# EAGLE board Copernicus-DIP-Breakout-Panel-v14 (EAGLE 6.4)
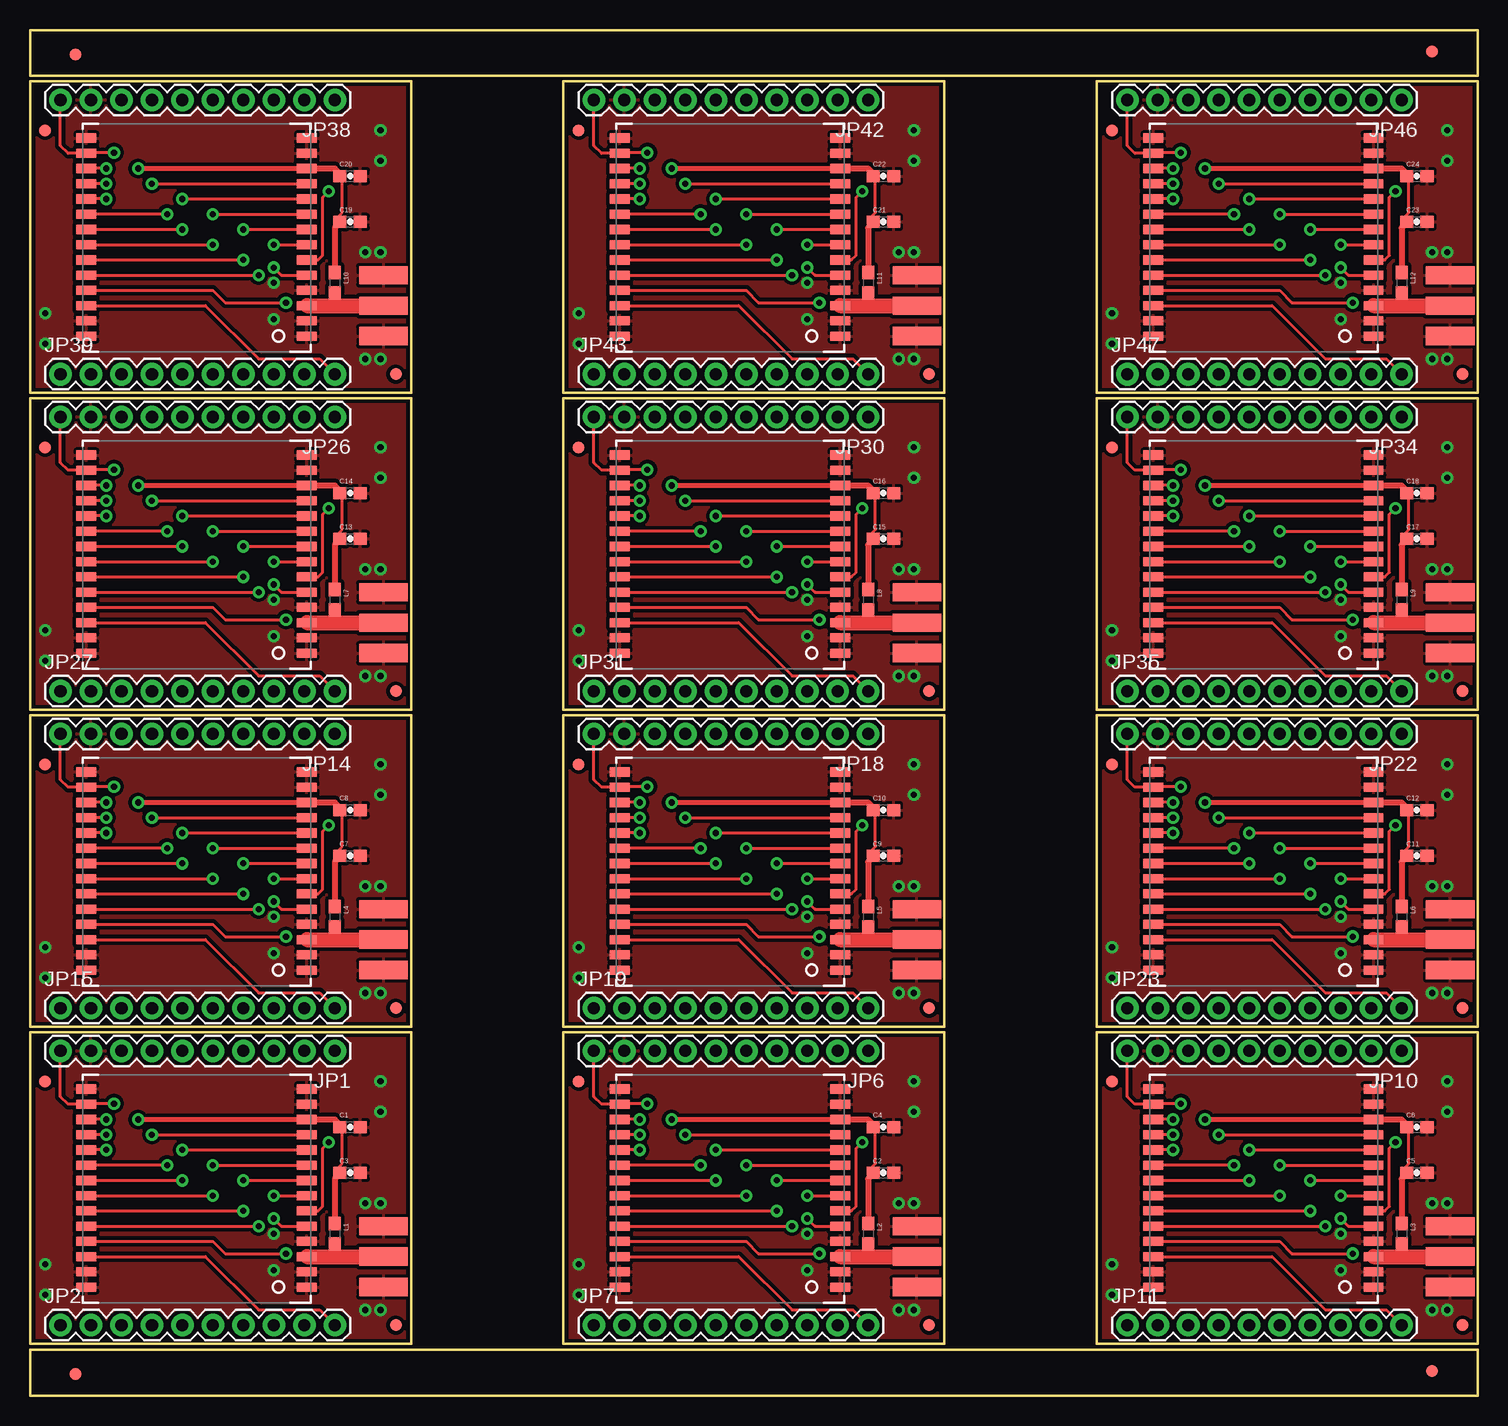
[diagram p0: board, top side]
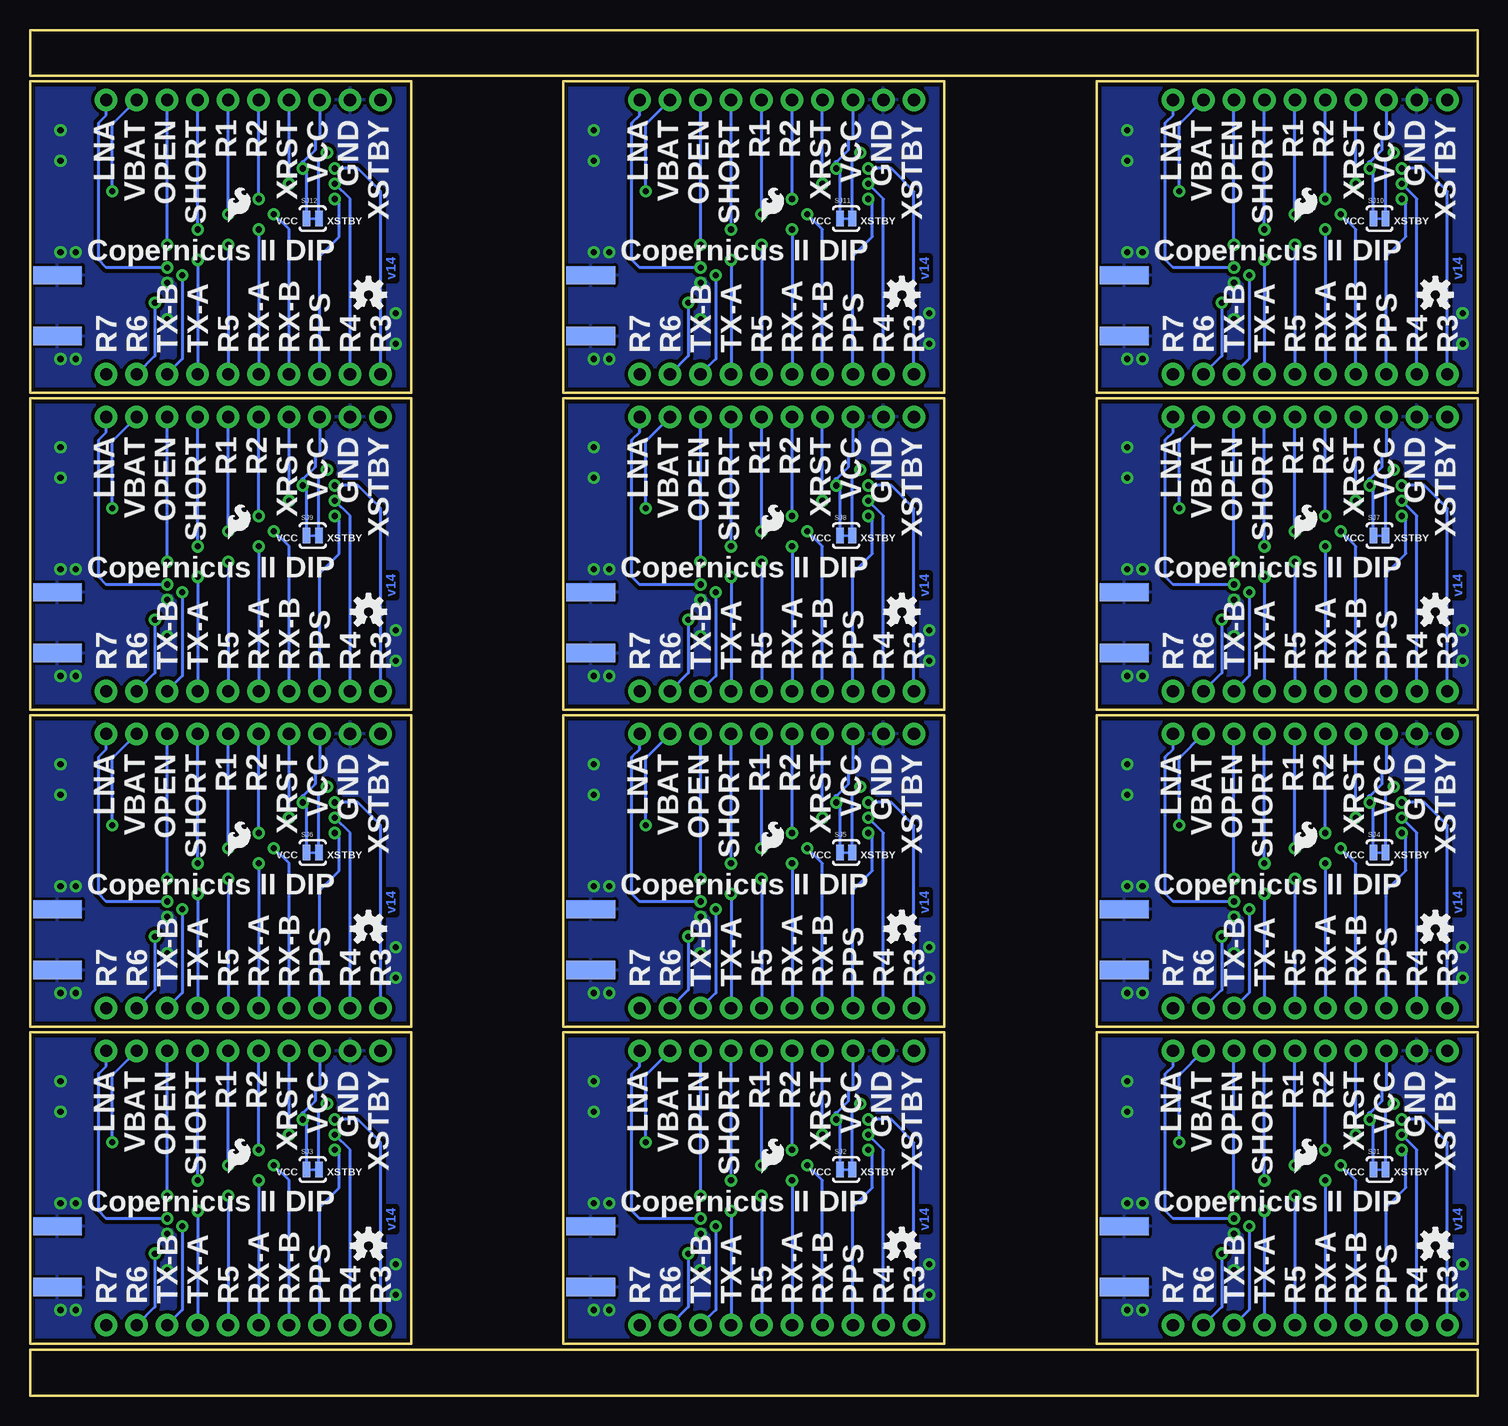
[diagram p1: board, bottom side, seen from below]

Size 120.65 x 113.79 mm. Coordinates in mm from the lower left corner, seen from the top.
Outline: 0,4.32 31.75,4.32 31.75,30.26 0,30.26 0,4.32
Outline: 44.45,4.32 76.2,4.32 76.2,30.26 44.45,30.26 44.45,4.32
Outline: 88.9,4.32 120.65,4.32 120.65,30.26 88.9,30.26 88.9,4.32
Outline: 0,30.73 31.75,30.73 31.75,56.67 0,56.67 0,30.73
Outline: 44.45,30.73 76.2,30.73 76.2,56.67 44.45,56.67 44.45,30.73
Outline: 88.9,30.73 120.65,30.73 120.65,56.67 88.9,56.67 88.9,30.73
Outline: 0,57.15 31.75,57.15 31.75,83.09 0,83.09 0,57.15
Outline: 44.45,57.15 76.2,57.15 76.2,83.09 44.45,83.09 44.45,57.15
Outline: 88.9,57.15 120.65,57.15 120.65,83.09 88.9,83.09 88.9,57.15
Outline: 0,83.57 31.75,83.57 31.75,109.51 0,109.51 0,83.57
Outline: 44.45,83.57 76.2,83.57 76.2,109.51 44.45,109.51 44.45,83.57
Outline: 88.9,83.57 120.65,83.57 120.65,109.51 88.9,109.51 88.9,83.57
Outline: 0,109.98 120.65,109.98 120.65,113.79 0,113.79 0,109.98
Outline: 120.65,3.81 0,3.81 0,0 87.38,0 88.9,0 120.65,0 120.65,3.81
Copper layers (1*16): Top 0.035mm / dielectric 1.5mm / Bottom 0.035mm
Design rules "SparkFun": minimum track width 8mil, minimum drill 20mil, track to track 8mil, track to pad 8mil, pad to pad 8mil, via to via 8mil, smd to smd 8mil, copper to edge 8mil, drill to drill 8mil, minimum pad ring 12mil, minimum via ring 10mil, stop-mask expansion 4mil, vias tented up to drill 20mil, thermal gap 10mil
Net classes: 0 default: width 0.254 mm; 1 power: width 0.305 mm

## Footprints (pad centres in the part's own frame; a part is rotated, then mirrored left to right if it is on the bottom)
0603-CAP = smd 1.1 x 1: 1 -0.85,0; 2 0.85,0
FIDUCIAL-1X2 = smd 1 x 1: 1 0,0
1X10 = drill 1.016 pad 1.88: 1 0,0; 2 2.54,0; 3 5.08,0; 4 7.62,0; 5 10.16,0; 6 12.7,0; 7 15.24,0; 8 17.78,0; 9 20.32,0; 10 22.86,0
SMA_EDGE = smd 1.524 x 4.064: GND@0 0,0; GND@1 5.08,0; SIG 2.54,0 | smd 1.524 x 4.064 bottom: GND@2 0,0; GND@3 5.08,0
0603 = smd 1.1 x 1: 1 -0.85,0; 2 0.85,0
SJ_2S-TRACE = smd 0.635 x 1.27: 1 -0.508,0; 2 0.508,0
COPERNICUS = smd 0.762 x 1.651: 1 0,-18.364; 2 1.27,-18.364; 3 2.54,-18.364; 4 3.81,-18.364; 5 5.08,-18.364; 6 6.35,-18.364; 7 7.62,-18.364; 8 8.89,-18.364; 9 10.16,-18.364; 10 11.43,-18.364; 11 12.7,-18.364; 12 13.97,-18.364; 13 15.24,-18.364; 14 16.51,-18.364; 15 16.51,0; 16 15.24,0; 17 13.97,0; 18 12.7,0; 19 11.43,0; 20 10.16,0; 21 8.89,0; 22 7.62,0; 23 6.35,0; 24 5.08,0; 25 3.81,0; 26 2.54,0; 27 1.27,0; 28 0,0

## Placement (x,y rotation side)
C1  0.1uF  [0603-CAP]  26.67,22.37 0 top
C2  22pF  [0603-CAP]  71.12,18.56 0 top
C3  22pF  [0603-CAP]  26.67,18.56 0 top
C4  0.1uF  [0603-CAP]  71.12,22.37 0 top
C5  22pF  [0603-CAP]  115.57,18.56 0 top
C6  0.1uF  [0603-CAP]  115.57,22.37 0 top
C7  22pF  [0603-CAP]  26.67,44.97 0 top
C8  0.1uF  [0603-CAP]  26.67,48.78 0 top
C9  22pF  [0603-CAP]  71.12,44.97 0 top
C10  0.1uF  [0603-CAP]  71.12,48.78 0 top
C11  22pF  [0603-CAP]  115.57,44.97 0 top
C12  0.1uF  [0603-CAP]  115.57,48.78 0 top
C13  22pF  [0603-CAP]  26.67,71.39 0 top
C14  0.1uF  [0603-CAP]  26.67,75.2 0 top
C15  22pF  [0603-CAP]  71.12,71.39 0 top
C16  0.1uF  [0603-CAP]  71.12,75.2 0 top
C17  22pF  [0603-CAP]  115.57,71.39 0 top
C18  0.1uF  [0603-CAP]  115.57,75.2 0 top
C19  22pF  [0603-CAP]  26.67,97.81 0 top
C20  0.1uF  [0603-CAP]  26.67,101.62 0 top
C21  22pF  [0603-CAP]  71.12,97.81 0 top
C22  0.1uF  [0603-CAP]  71.12,101.62 0 top
C23  22pF  [0603-CAP]  115.57,97.81 0 top
C24  0.1uF  [0603-CAP]  115.57,101.62 0 top
E$1  [FIDUCIAL-1X2]  3.81,111.76 270 top
E$2  [FIDUCIAL-1X2]  116.84,112.01 90 top
E$3  [FIDUCIAL-1X2]  116.84,2.03 90 top
E$4  [FIDUCIAL-1X2]  3.81,1.78 270 top
JP1  [1X10]  25.4,28.72 180 top
JP2  [1X10]  2.54,5.86 0 top
JP3  SMA_EDGE  [SMA_EDGE]  29.46,14.11 270 top
JP4  LOGO-SFESK  [SFE-LOGO-FLAME]  15.24,18.56 0 bottom
JP5  SMA_EDGE  [SMA_EDGE]  73.91,14.11 270 top
JP6  [1X10]  69.85,28.72 180 top
JP7  [1X10]  46.99,5.86 0 top
JP8  LOGO-SFESK  [SFE-LOGO-FLAME]  59.69,18.56 0 bottom
JP9  SMA_EDGE  [SMA_EDGE]  118.36,14.11 270 top
JP10  [1X10]  114.3,28.72 180 top
JP11  [1X10]  91.44,5.86 0 top
JP12  LOGO-SFESK  [SFE-LOGO-FLAME]  104.14,18.56 0 bottom
JP13  SMA_EDGE  [SMA_EDGE]  29.46,40.53 270 top
JP14  [1X10]  25.4,55.13 180 top
JP15  [1X10]  2.54,32.27 0 top
JP16  LOGO-SFESK  [SFE-LOGO-FLAME]  15.24,44.97 0 bottom
JP17  SMA_EDGE  [SMA_EDGE]  73.91,40.53 270 top
JP18  [1X10]  69.85,55.13 180 top
JP19  [1X10]  46.99,32.27 0 top
JP20  LOGO-SFESK  [SFE-LOGO-FLAME]  59.69,44.97 0 bottom
JP21  SMA_EDGE  [SMA_EDGE]  118.36,40.53 270 top
JP22  [1X10]  114.3,55.13 180 top
JP23  [1X10]  91.44,32.27 0 top
JP24  LOGO-SFESK  [SFE-LOGO-FLAME]  104.14,44.97 0 bottom
JP25  SMA_EDGE  [SMA_EDGE]  29.46,66.95 270 top
JP26  [1X10]  25.4,81.55 180 top
JP27  [1X10]  2.54,58.69 0 top
JP28  LOGO-SFESK  [SFE-LOGO-FLAME]  15.24,71.39 0 bottom
JP29  SMA_EDGE  [SMA_EDGE]  73.91,66.95 270 top
JP30  [1X10]  69.85,81.55 180 top
JP31  [1X10]  46.99,58.69 0 top
JP32  LOGO-SFESK  [SFE-LOGO-FLAME]  59.69,71.39 0 bottom
JP33  SMA_EDGE  [SMA_EDGE]  118.36,66.95 270 top
JP34  [1X10]  114.3,81.55 180 top
JP35  [1X10]  91.44,58.69 0 top
JP36  LOGO-SFESK  [SFE-LOGO-FLAME]  104.14,71.39 0 bottom
JP37  SMA_EDGE  [SMA_EDGE]  29.46,93.36 270 top
JP38  [1X10]  25.4,107.97 180 top
JP39  [1X10]  2.54,85.11 0 top
JP40  LOGO-SFESK  [SFE-LOGO-FLAME]  15.24,97.81 0 bottom
JP41  SMA_EDGE  [SMA_EDGE]  73.91,93.36 270 top
JP42  [1X10]  69.85,107.97 180 top
JP43  [1X10]  46.99,85.11 0 top
JP44  LOGO-SFESK  [SFE-LOGO-FLAME]  59.69,97.81 0 bottom
JP45  SMA_EDGE  [SMA_EDGE]  118.36,93.36 270 top
JP46  [1X10]  114.3,107.97 180 top
JP47  [1X10]  91.44,85.11 0 top
JP48  LOGO-SFESK  [SFE-LOGO-FLAME]  104.14,97.81 0 bottom
L1  33nH  [0603]  25.4,13.48 270 top
L2  33nH  [0603]  69.85,13.48 270 top
L3  33nH  [0603]  114.3,13.48 270 top
L4  33nH  [0603]  25.4,39.89 270 top
L5  33nH  [0603]  69.85,39.89 270 top
L6  33nH  [0603]  114.3,39.89 270 top
L7  33nH  [0603]  25.4,66.31 270 top
L8  33nH  [0603]  69.85,66.31 270 top
L9  33nH  [0603]  114.3,66.31 270 top
L10  33nH  [0603]  25.4,92.73 270 top
L11  33nH  [0603]  69.85,92.73 270 top
L12  33nH  [0603]  114.3,92.73 270 top
SJ1  SOLDERJUMPERTRACE  [SJ_2S-TRACE]  8.19,18.83 0 bottom
SJ2  SOLDERJUMPERTRACE  [SJ_2S-TRACE]  52.64,18.83 0 bottom
SJ3  SOLDERJUMPERTRACE  [SJ_2S-TRACE]  97.09,18.83 0 bottom
SJ4  SOLDERJUMPERTRACE  [SJ_2S-TRACE]  8.19,45.24 0 bottom
SJ5  SOLDERJUMPERTRACE  [SJ_2S-TRACE]  52.64,45.24 0 bottom
SJ6  SOLDERJUMPERTRACE  [SJ_2S-TRACE]  97.09,45.24 0 bottom
SJ7  SOLDERJUMPERTRACE  [SJ_2S-TRACE]  8.19,71.66 0 bottom
SJ8  SOLDERJUMPERTRACE  [SJ_2S-TRACE]  52.64,71.66 0 bottom
SJ9  SOLDERJUMPERTRACE  [SJ_2S-TRACE]  97.09,71.66 0 bottom
SJ10  SOLDERJUMPERTRACE  [SJ_2S-TRACE]  8.19,98.08 0 bottom
SJ11  SOLDERJUMPERTRACE  [SJ_2S-TRACE]  52.64,98.08 0 bottom
SJ12  SOLDERJUMPERTRACE  [SJ_2S-TRACE]  97.09,98.08 0 bottom
U1  COPERNICUS  [COPERNICUS]  4.7,9.03 90 top
U2  COPERNICUS  [COPERNICUS]  49.15,9.03 90 top
U3  COPERNICUS  [COPERNICUS]  93.6,9.03 90 top
U4  COPERNICUS  [COPERNICUS]  4.7,35.45 90 top
U5  COPERNICUS  [COPERNICUS]  49.15,35.45 90 top
U6  COPERNICUS  [COPERNICUS]  93.6,35.45 90 top
U7  COPERNICUS  [COPERNICUS]  4.7,61.86 90 top
U8  COPERNICUS  [COPERNICUS]  49.15,61.86 90 top
U9  COPERNICUS  [COPERNICUS]  93.6,61.86 90 top
U10  COPERNICUS  [COPERNICUS]  4.7,88.28 90 top
U11  COPERNICUS  [COPERNICUS]  49.15,88.28 90 top
U12  COPERNICUS  [COPERNICUS]  93.6,88.28 90 top
U$1  OSHW-LOGOS  [OSHW-LOGO-S]  3.54,12.48 0 bottom
U$2  FIDUCIAL1X2  [FIDUCIAL-1X2]  1.27,26.18 0 top
U$3  FIDUCIAL1X2  [FIDUCIAL-1X2]  30.48,5.86 0 top
U$4  FIDUCIAL1X2  [FIDUCIAL-1X2]  45.72,26.18 0 top
U$5  FIDUCIAL1X2  [FIDUCIAL-1X2]  74.93,5.86 0 top
U$6  OSHW-LOGOS  [OSHW-LOGO-S]  47.99,12.48 0 bottom
U$7  FIDUCIAL1X2  [FIDUCIAL-1X2]  90.17,26.18 0 top
U$8  FIDUCIAL1X2  [FIDUCIAL-1X2]  119.38,5.86 0 top
U$9  OSHW-LOGOS  [OSHW-LOGO-S]  92.44,12.48 0 bottom
U$10  FIDUCIAL1X2  [FIDUCIAL-1X2]  1.27,52.59 0 top
U$11  FIDUCIAL1X2  [FIDUCIAL-1X2]  30.48,32.27 0 top
U$12  OSHW-LOGOS  [OSHW-LOGO-S]  3.54,38.89 0 bottom
U$13  FIDUCIAL1X2  [FIDUCIAL-1X2]  45.72,52.59 0 top
U$14  FIDUCIAL1X2  [FIDUCIAL-1X2]  74.93,32.27 0 top
U$15  OSHW-LOGOS  [OSHW-LOGO-S]  47.99,38.89 0 bottom
U$16  FIDUCIAL1X2  [FIDUCIAL-1X2]  90.17,52.59 0 top
U$17  FIDUCIAL1X2  [FIDUCIAL-1X2]  119.38,32.27 0 top
U$18  OSHW-LOGOS  [OSHW-LOGO-S]  92.44,38.89 0 bottom
U$19  FIDUCIAL1X2  [FIDUCIAL-1X2]  1.27,79.01 0 top
U$20  FIDUCIAL1X2  [FIDUCIAL-1X2]  30.48,58.69 0 top
U$21  OSHW-LOGOS  [OSHW-LOGO-S]  3.54,65.31 0 bottom
U$22  FIDUCIAL1X2  [FIDUCIAL-1X2]  45.72,79.01 0 top
U$23  FIDUCIAL1X2  [FIDUCIAL-1X2]  74.93,58.69 0 top
U$24  OSHW-LOGOS  [OSHW-LOGO-S]  47.99,65.31 0 bottom
U$25  FIDUCIAL1X2  [FIDUCIAL-1X2]  90.17,79.01 0 top
U$26  FIDUCIAL1X2  [FIDUCIAL-1X2]  119.38,58.69 0 top
U$27  OSHW-LOGOS  [OSHW-LOGO-S]  92.44,65.31 0 bottom
U$28  FIDUCIAL1X2  [FIDUCIAL-1X2]  1.27,105.43 0 top
U$29  FIDUCIAL1X2  [FIDUCIAL-1X2]  30.48,85.11 0 top
U$30  OSHW-LOGOS  [OSHW-LOGO-S]  3.54,91.73 0 bottom
U$31  FIDUCIAL1X2  [FIDUCIAL-1X2]  45.72,105.43 0 top
U$32  FIDUCIAL1X2  [FIDUCIAL-1X2]  74.93,85.11 0 top
U$33  OSHW-LOGOS  [OSHW-LOGO-S]  47.99,91.73 0 bottom
U$34  FIDUCIAL1X2  [FIDUCIAL-1X2]  90.17,105.43 0 top
U$35  FIDUCIAL1X2  [FIDUCIAL-1X2]  119.38,85.11 0 top
U$36  OSHW-LOGOS  [OSHW-LOGO-S]  92.44,91.73 0 bottom

## Library data of the parts
C1-C24 L1-L12 SJ1-SJ12 = SparkFun-Passives
E$1-E$4 JP4 JP8 JP12 JP16 JP20 JP24 JP28 JP32 JP36 JP40 JP44 JP48 U$1 U$6 U$9 U$12 U$15 U$18 U$21 U$24 U$27 U$30 U$33 U$36 = SparkFun-Aesthetics
JP1 JP2 JP6 JP7 JP10 JP11 JP14 JP15 JP18 JP19 JP22 JP23 JP26 JP27 JP30 JP31 JP34 JP35 JP38 JP39 JP42 JP43 JP46 JP47 U$2-U$5 U$7 U$8 U$10 U$11 U$13 U$14 U$16 U$17 U$19 U$20 U$22 U$23 U$25 U$26 U$28 U$29 U$31 U$32 U$34 U$35 = SparkFun
JP3 JP5 JP9 JP13 JP17 JP21 JP25 JP29 JP33 JP37 JP41 JP45 = SparkFun-Nate
U1-U12 = SparkFun-RF

## Nets
GND: C1.2 C3.2 JP1.9 JP3.GND@0 JP3.GND@1 JP3.GND@2 JP3.GND@3 U1.1 U1.2 U1.4 U1.13 U1.14 U1.15 U1.27 U1.28
GND1: C2.2 C4.2 JP5.GND@0 JP5.GND@1 JP5.GND@2 JP5.GND@3 JP6.9 U2.1 U2.2 U2.4 U2.13 U2.14 U2.15 U2.27 U2.28
GND2: C5.2 C6.2 JP9.GND@0 JP9.GND@1 JP9.GND@2 JP9.GND@3 JP10.9 U3.1 U3.2 U3.4 U3.13 U3.14 U3.15 U3.27 U3.28
GND3: C7.2 C8.2 JP13.GND@0 JP13.GND@1 JP13.GND@2 JP13.GND@3 JP14.9 U4.1 U4.2 U4.4 U4.13 U4.14 U4.15 U4.27 U4.28
GND4: C9.2 C10.2 JP17.GND@0 JP17.GND@1 JP17.GND@2 JP17.GND@3 JP18.9 U5.1 U5.2 U5.4 U5.13 U5.14 U5.15 U5.27 U5.28
GND5: C11.2 C12.2 JP21.GND@0 JP21.GND@1 JP21.GND@2 JP21.GND@3 JP22.9 U6.1 U6.2 U6.4 U6.13 U6.14 U6.15 U6.27 U6.28
GND6: C13.2 C14.2 JP25.GND@0 JP25.GND@1 JP25.GND@2 JP25.GND@3 JP26.9 U7.1 U7.2 U7.4 U7.13 U7.14 U7.15 U7.27 U7.28
GND7: C15.2 C16.2 JP29.GND@0 JP29.GND@1 JP29.GND@2 JP29.GND@3 JP30.9 U8.1 U8.2 U8.4 U8.13 U8.14 U8.15 U8.27 U8.28
GND8: C17.2 C18.2 JP33.GND@0 JP33.GND@1 JP33.GND@2 JP33.GND@3 JP34.9 U9.1 U9.2 U9.4 U9.13 U9.14 U9.15 U9.27 U9.28
GND9: C19.2 C20.2 JP37.GND@0 JP37.GND@1 JP37.GND@2 JP37.GND@3 JP38.9 U10.1 U10.2 U10.4 U10.13 U10.14 U10.15 U10.27 U10.28
GND10: C21.2 C22.2 JP41.GND@0 JP41.GND@1 JP41.GND@2 JP41.GND@3 JP42.9 U11.1 U11.2 U11.4 U11.13 U11.14 U11.15 U11.27 U11.28
GND11: C23.2 C24.2 JP45.GND@0 JP45.GND@1 JP45.GND@2 JP45.GND@3 JP46.9 U12.1 U12.2 U12.4 U12.13 U12.14 U12.15 U12.27 U12.28
LNA: JP1.1 U1.5
LNA1: JP6.1 U2.5
LNA2: JP10.1 U3.5
LNA3: JP14.1 U4.5
LNA4: JP18.1 U5.5
LNA5: JP22.1 U6.5
LNA6: JP26.1 U7.5
LNA7: JP30.1 U8.5
LNA8: JP34.1 U9.5
LNA9: JP38.1 U10.5
LNA10: JP42.1 U11.5
LNA11: JP46.1 U12.5
OPEN: JP1.3 U1.7
OPEN1: JP6.3 U2.7
OPEN2: JP10.3 U3.7
OPEN3: JP14.3 U4.7
OPEN4: JP18.3 U5.7
OPEN5: JP22.3 U6.7
OPEN6: JP26.3 U7.7
OPEN7: JP30.3 U8.7
OPEN8: JP34.3 U9.7
OPEN9: JP38.3 U10.7
OPEN10: JP42.3 U11.7
OPEN11: JP46.3 U12.7
PPS: JP2.3 U1.19
PPS1: JP7.3 U2.19
PPS2: JP11.3 U3.19
PPS3: JP15.3 U4.19
PPS4: JP19.3 U5.19
PPS5: JP23.3 U6.19
PPS6: JP27.3 U7.19
PPS7: JP31.3 U8.19
PPS8: JP35.3 U9.19
PPS9: JP39.3 U10.19
PPS10: JP43.3 U11.19
PPS11: JP47.3 U12.19
R1: JP1.5 U1.9
R2: JP1.6 U1.10
R3: JP2.1 U1.17
R4: JP2.2 U1.18
R5: JP2.6 U1.22
R6: JP2.9 U1.25
R7: JP2.10 U1.26
R8: JP6.5 U2.9
R9: JP6.6 U2.10
R10: JP7.10 U2.26
R11: JP7.9 U2.25
R12: JP7.6 U2.22
R13: JP7.2 U2.18
R14: JP7.1 U2.17
R15: JP10.5 U3.9
R16: JP10.6 U3.10
R17: JP11.10 U3.26
R18: JP11.9 U3.25
R19: JP11.6 U3.22
R20: JP11.2 U3.18
R21: JP11.1 U3.17
R22: JP14.5 U4.9
R23: JP14.6 U4.10
R24: JP15.10 U4.26
R25: JP15.9 U4.25
R26: JP15.6 U4.22
R27: JP15.2 U4.18
R28: JP15.1 U4.17
R29: JP18.5 U5.9
R30: JP18.6 U5.10
R31: JP19.10 U5.26
R32: JP19.9 U5.25
R33: JP19.6 U5.22
R34: JP19.2 U5.18
R35: JP19.1 U5.17
R36: JP22.5 U6.9
R37: JP22.6 U6.10
R38: JP23.10 U6.26
R39: JP23.9 U6.25
R40: JP23.6 U6.22
R41: JP23.2 U6.18
R42: JP23.1 U6.17
R43: JP26.5 U7.9
R44: JP26.6 U7.10
R45: JP27.10 U7.26
R46: JP27.9 U7.25
R47: JP27.6 U7.22
R48: JP27.2 U7.18
R49: JP27.1 U7.17
R50: JP30.5 U8.9
R51: JP30.6 U8.10
R52: JP31.10 U8.26
R53: JP31.9 U8.25
R54: JP31.6 U8.22
R55: JP31.2 U8.18
R56: JP31.1 U8.17
R57: JP34.5 U9.9
R58: JP34.6 U9.10
R59: JP35.10 U9.26
R60: JP35.9 U9.25
R61: JP35.6 U9.22
R62: JP35.2 U9.18
R63: JP35.1 U9.17
R64: JP38.5 U10.9
R65: JP38.6 U10.10
R66: JP39.10 U10.26
R67: JP39.9 U10.25
R68: JP39.6 U10.22
R69: JP39.2 U10.18
R70: JP39.1 U10.17
R71: JP42.5 U11.9
R72: JP42.6 U11.10
R73: JP43.10 U11.26
R74: JP43.9 U11.25
R75: JP43.6 U11.22
R76: JP43.2 U11.18
R77: JP43.1 U11.17
R78: JP46.5 U12.9
R79: JP46.6 U12.10
R80: JP47.10 U12.26
R81: JP47.9 U12.25
R82: JP47.6 U12.22
R83: JP47.2 U12.18
R84: JP47.1 U12.17
RFIN: JP3.SIG L1.2 U1.3
RFIN1: JP5.SIG L2.2 U2.3
RFIN2: JP9.SIG L3.2 U3.3
RFIN3: JP13.SIG L4.2 U4.3
RFIN4: JP17.SIG L5.2 U5.3
RFIN5: JP21.SIG L6.2 U6.3
RFIN6: JP25.SIG L7.2 U7.3
RFIN7: JP29.SIG L8.2 U8.3
RFIN8: JP33.SIG L9.2 U9.3
RFIN9: JP37.SIG L10.2 U10.3
RFIN10: JP41.SIG L11.2 U11.3
RFIN11: JP45.SIG L12.2 U12.3
RX-A: JP2.5 U1.21
RX-A1: JP7.5 U2.21
RX-A2: JP11.5 U3.21
RX-A3: JP15.5 U4.21
RX-A4: JP19.5 U5.21
RX-A5: JP23.5 U6.21
RX-A6: JP27.5 U7.21
RX-A7: JP31.5 U8.21
RX-A8: JP35.5 U9.21
RX-A9: JP39.5 U10.21
RX-A10: JP43.5 U11.21
RX-A11: JP47.5 U12.21
RX-B: JP2.4 U1.20
RX-B1: JP7.4 U2.20
RX-B2: JP11.4 U3.20
RX-B3: JP15.4 U4.20
RX-B4: JP19.4 U5.20
RX-B5: JP23.4 U6.20
RX-B6: JP27.4 U7.20
RX-B7: JP31.4 U8.20
RX-B8: JP35.4 U9.20
RX-B9: JP39.4 U10.20
RX-B10: JP43.4 U11.20
RX-B11: JP47.4 U12.20
SHORT: JP1.4 U1.8
SHORT1: JP6.4 U2.8
SHORT2: JP10.4 U3.8
SHORT3: JP14.4 U4.8
SHORT4: JP18.4 U5.8
SHORT5: JP22.4 U6.8
SHORT6: JP26.4 U7.8
SHORT7: JP30.4 U8.8
SHORT8: JP34.4 U9.8
SHORT9: JP38.4 U10.8
SHORT10: JP42.4 U11.8
SHORT11: JP46.4 U12.8
TX-A: JP2.7 U1.23
TX-A1: JP7.7 U2.23
TX-A2: JP11.7 U3.23
TX-A3: JP15.7 U4.23
TX-A4: JP19.7 U5.23
TX-A5: JP23.7 U6.23
TX-A6: JP27.7 U7.23
TX-A7: JP31.7 U8.23
TX-A8: JP35.7 U9.23
TX-A9: JP39.7 U10.23
TX-A10: JP43.7 U11.23
TX-A11: JP47.7 U12.23
TX-B: JP2.8 U1.24
TX-B1: JP7.8 U2.24
TX-B2: JP11.8 U3.24
TX-B3: JP15.8 U4.24
TX-B4: JP19.8 U5.24
TX-B5: JP23.8 U6.24
TX-B6: JP27.8 U7.24
TX-B7: JP31.8 U8.24
TX-B8: JP35.8 U9.24
TX-B9: JP39.8 U10.24
TX-B10: JP43.8 U11.24
TX-B11: JP47.8 U12.24
VBAT: JP1.2 U1.6
VBAT1: JP6.2 U2.6
VBAT2: JP10.2 U3.6
VBAT3: JP14.2 U4.6
VBAT4: JP18.2 U5.6
VBAT5: JP22.2 U6.6
VBAT6: JP26.2 U7.6
VBAT7: JP30.2 U8.6
VBAT8: JP34.2 U9.6
VBAT9: JP38.2 U10.6
VBAT10: JP42.2 U11.6
VBAT11: JP46.2 U12.6
VCC: C1.1 C3.1 JP1.8 L1.1 SJ1.1 U1.12
VCC1: C2.1 C4.1 JP6.8 L2.1 SJ2.1 U2.12
VCC2: C5.1 C6.1 JP10.8 L3.1 SJ3.1 U3.12
VCC3: C7.1 C8.1 JP14.8 L4.1 SJ4.1 U4.12
VCC4: C9.1 C10.1 JP18.8 L5.1 SJ5.1 U5.12
VCC5: C11.1 C12.1 JP22.8 L6.1 SJ6.1 U6.12
VCC6: C13.1 C14.1 JP26.8 L7.1 SJ7.1 U7.12
VCC7: C15.1 C16.1 JP30.8 L8.1 SJ8.1 U8.12
VCC8: C17.1 C18.1 JP34.8 L9.1 SJ9.1 U9.12
VCC9: C19.1 C20.1 JP38.8 L10.1 SJ10.1 U10.12
VCC10: C21.1 C22.1 JP42.8 L11.1 SJ11.1 U11.12
VCC11: C23.1 C24.1 JP46.8 L12.1 SJ12.1 U12.12
XRST: JP1.7 U1.11
XRST1: JP6.7 U2.11
XRST2: JP10.7 U3.11
XRST3: JP14.7 U4.11
XRST4: JP18.7 U5.11
XRST5: JP22.7 U6.11
XRST6: JP26.7 U7.11
XRST7: JP30.7 U8.11
XRST8: JP34.7 U9.11
XRST9: JP38.7 U10.11
XRST10: JP42.7 U11.11
XRST11: JP46.7 U12.11
XSTBY: JP1.10 SJ1.2 U1.16
XSTBY1: JP6.10 SJ2.2 U2.16
XSTBY2: JP10.10 SJ3.2 U3.16
XSTBY3: JP14.10 SJ4.2 U4.16
XSTBY4: JP18.10 SJ5.2 U5.16
XSTBY5: JP22.10 SJ6.2 U6.16
XSTBY6: JP26.10 SJ7.2 U7.16
XSTBY7: JP30.10 SJ8.2 U8.16
XSTBY8: JP34.10 SJ9.2 U9.16
XSTBY9: JP38.10 SJ10.2 U10.16
XSTBY10: JP42.10 SJ11.2 U11.16
XSTBY11: JP46.10 SJ12.2 U12.16

## Tracks (layer width: path | path; a pad name or v marks a point on that pad's centre or on a via)
GND  (via drill 0.51)
  other vias: 20.32,13.48 20.32,10.43 29.21,7.13 29.21,16.02 27.94,16.02 27.94,7.13 1.27,8.4 1.27,10.94 29.21,26.18 29.21,23.64
  pour Bottom (isolate 0.305): 0,30.26 31.75,30.26 31.75,4.32 0,4.32
  pour Top (isolate 0.305): 31.75,30.26 31.75,4.32 0,4.32 0,30.26
GND1  (via drill 0.51)
  other vias: 64.77,13.48 64.77,10.43 73.66,7.13 73.66,16.02 72.39,16.02 72.39,7.13 45.72,8.4 45.72,10.94 73.66,26.18 73.66,23.64
  pour Bottom (isolate 0.305): 44.45,30.26 76.2,30.26 76.2,4.32 44.45,4.32
  pour Top (isolate 0.305): 76.2,30.26 76.2,4.32 44.45,4.32 44.45,30.26
GND2  (via drill 0.51)
  other vias: 109.22,13.48 109.22,10.43 118.11,7.13 118.11,16.02 116.84,16.02 116.84,7.13 90.17,8.4 90.17,10.94 118.11,26.18 118.11,23.64
  pour Bottom (isolate 0.305): 88.9,30.26 120.65,30.26 120.65,4.32 88.9,4.32
  pour Top (isolate 0.305): 120.65,30.26 120.65,4.32 88.9,4.32 88.9,30.26
GND3  (via drill 0.51)
  other vias: 20.32,39.89 20.32,36.85 29.21,33.54 29.21,42.43 27.94,42.43 27.94,33.54 1.27,34.81 1.27,37.35 29.21,52.59 29.21,50.05
  pour Bottom (isolate 0.305): 0,56.67 31.75,56.67 31.75,30.73 0,30.73
  pour Top (isolate 0.305): 31.75,56.67 31.75,30.73 0,30.73 0,56.67
GND4  (via drill 0.51)
  other vias: 64.77,39.89 64.77,36.85 73.66,33.54 73.66,42.43 72.39,42.43 72.39,33.54 45.72,34.81 45.72,37.35 73.66,52.59 73.66,50.05
  pour Bottom (isolate 0.305): 44.45,56.67 76.2,56.67 76.2,30.73 44.45,30.73
  pour Top (isolate 0.305): 76.2,56.67 76.2,30.73 44.45,30.73 44.45,56.67
GND5  (via drill 0.51)
  other vias: 109.22,39.89 109.22,36.85 118.11,33.54 118.11,42.43 116.84,42.43 116.84,33.54 90.17,34.81 90.17,37.35 118.11,52.59 118.11,50.05
  pour Bottom (isolate 0.305): 88.9,56.67 120.65,56.67 120.65,30.73 88.9,30.73
  pour Top (isolate 0.305): 120.65,56.67 120.65,30.73 88.9,30.73 88.9,56.67
GND6  (via drill 0.51)
  other vias: 20.32,66.31 20.32,63.26 29.21,59.96 29.21,68.85 27.94,68.85 27.94,59.96 1.27,61.23 1.27,63.77 29.21,79.01 29.21,76.47
  pour Bottom (isolate 0.305): 0,83.09 31.75,83.09 31.75,57.15 0,57.15
  pour Top (isolate 0.305): 31.75,83.09 31.75,57.15 0,57.15 0,83.09
GND7  (via drill 0.51)
  other vias: 64.77,66.31 64.77,63.26 73.66,59.96 73.66,68.85 72.39,68.85 72.39,59.96 45.72,61.23 45.72,63.77 73.66,79.01 73.66,76.47
  pour Bottom (isolate 0.305): 44.45,83.09 76.2,83.09 76.2,57.15 44.45,57.15
  pour Top (isolate 0.305): 76.2,83.09 76.2,57.15 44.45,57.15 44.45,83.09
GND8  (via drill 0.51)
  other vias: 109.22,66.31 109.22,63.26 118.11,59.96 118.11,68.85 116.84,68.85 116.84,59.96 90.17,61.23 90.17,63.77 118.11,79.01 118.11,76.47
  pour Bottom (isolate 0.305): 88.9,83.09 120.65,83.09 120.65,57.15 88.9,57.15
  pour Top (isolate 0.305): 120.65,83.09 120.65,57.15 88.9,57.15 88.9,83.09
GND9  (via drill 0.51)
  other vias: 20.32,92.73 20.32,89.68 29.21,86.38 29.21,95.27 27.94,95.27 27.94,86.38 1.27,87.65 1.27,90.19 29.21,105.43 29.21,102.89
  pour Bottom (isolate 0.305): 0,109.51 31.75,109.51 31.75,83.57 0,83.57
  pour Top (isolate 0.305): 31.75,109.51 31.75,83.57 0,83.57 0,109.51
GND10  (via drill 0.51)
  other vias: 64.77,92.73 64.77,89.68 73.66,86.38 73.66,95.27 72.39,95.27 72.39,86.38 45.72,87.65 45.72,90.19 73.66,105.43 73.66,102.89
  pour Bottom (isolate 0.305): 44.45,109.51 76.2,109.51 76.2,83.57 44.45,83.57
  pour Top (isolate 0.305): 76.2,109.51 76.2,83.57 44.45,83.57 44.45,109.51
GND11  (via drill 0.51)
  other vias: 109.22,92.73 109.22,89.68 118.11,86.38 118.11,95.27 116.84,95.27 116.84,86.38 90.17,87.65 90.17,90.19 118.11,105.43 118.11,102.89
  pour Bottom (isolate 0.305): 88.9,109.51 120.65,109.51 120.65,83.57 88.9,83.57
  pour Top (isolate 0.305): 120.65,109.51 120.65,83.57 88.9,83.57 88.9,109.51
LNA  (via drill 0.51)
  Top 0.254: U1.5 20.95,14.11 v20.32,14.75
  Bottom 0.254: v20.32,14.75 25.4,14.75 26.04,15.38 26.04,26.81 25.4,27.45 JP1.1
LNA1  (via drill 0.51)
  Top 0.254: U2.5 65.41,14.11 v64.77,14.75
  Bottom 0.254: v64.77,14.75 69.85,14.75 70.48,15.38 70.48,26.81 69.85,27.45 JP6.1
LNA2  (via drill 0.51)
  Top 0.254: U3.5 109.86,14.11 v109.22,14.75
  Bottom 0.254: v109.22,14.75 114.3,14.75 114.94,15.38 114.94,26.81 114.3,27.45 JP10.1
LNA3  (via drill 0.51)
  Top 0.254: U4.5 20.95,40.53 v20.32,41.16
  Bottom 0.254: v20.32,41.16 25.4,41.16 26.04,41.8 26.04,53.23 25.4,53.86 JP14.1
LNA4  (via drill 0.51)
  Top 0.254: U5.5 65.41,40.53 v64.77,41.16
  Bottom 0.254: v64.77,41.16 69.85,41.16 70.48,41.8 70.48,53.23 69.85,53.86 JP18.1
LNA5  (via drill 0.51)
  Top 0.254: U6.5 109.86,40.53 v109.22,41.16
  Bottom 0.254: v109.22,41.16 114.3,41.16 114.94,41.8 114.94,53.23 114.3,53.86 JP22.1
LNA6  (via drill 0.51)
  Top 0.254: U7.5 20.95,66.95 v20.32,67.58
  Bottom 0.254: v20.32,67.58 25.4,67.58 26.04,68.22 26.04,79.64 25.4,80.28 JP26.1
LNA7  (via drill 0.51)
  Top 0.254: U8.5 65.41,66.95 v64.77,67.58
  Bottom 0.254: v64.77,67.58 69.85,67.58 70.48,68.22 70.48,79.64 69.85,80.28 JP30.1
LNA8  (via drill 0.51)
  Top 0.254: U9.5 109.86,66.95 v109.22,67.58
  Bottom 0.254: v109.22,67.58 114.3,67.58 114.94,68.22 114.94,79.64 114.3,80.28 JP34.1
LNA9  (via drill 0.51)
  Top 0.254: U10.5 20.95,93.36 v20.32,94
  Bottom 0.254: v20.32,94 25.4,94 26.04,94.63 26.04,106.06 25.4,106.7 JP38.1
LNA10  (via drill 0.51)
  Top 0.254: U11.5 65.41,93.36 v64.77,94
  Bottom 0.254: v64.77,94 69.85,94 70.48,94.63 70.48,106.06 69.85,106.7 JP42.1
LNA11  (via drill 0.51)
  Top 0.254: U12.5 109.86,93.36 v109.22,94
  Bottom 0.254: v109.22,94 114.3,94 114.94,94.63 114.94,106.06 114.3,106.7 JP46.1
OPEN  (via drill 0.51)
  Top 0.254: v20.32,16.65 U1.7
  Bottom 0.254: v20.32,16.65 JP1.3
OPEN1  (via drill 0.51)
  Top 0.254: v64.77,16.65 U2.7
  Bottom 0.254: v64.77,16.65 JP6.3
OPEN2  (via drill 0.51)
  Top 0.254: v109.22,16.65 U3.7
  Bottom 0.254: v109.22,16.65 JP10.3
OPEN3  (via drill 0.51)
  Top 0.254: v20.32,43.07 U4.7
  Bottom 0.254: v20.32,43.07 JP14.3
OPEN4  (via drill 0.51)
  Top 0.254: v64.77,43.07 U5.7
  Bottom 0.254: v64.77,43.07 JP18.3
OPEN5  (via drill 0.51)
  Top 0.254: v109.22,43.07 U6.7
  Bottom 0.254: v109.22,43.07 JP22.3
OPEN6  (via drill 0.51)
  Top 0.254: v20.32,69.48 U7.7
  Bottom 0.254: v20.32,69.48 JP26.3
OPEN7  (via drill 0.51)
  Top 0.254: v64.77,69.48 U8.7
  Bottom 0.254: v64.77,69.48 JP30.3
OPEN8  (via drill 0.51)
  Top 0.254: v109.22,69.48 U9.7
  Bottom 0.254: v109.22,69.48 JP34.3
OPEN9  (via drill 0.51)
  Top 0.254: v20.32,95.9 U10.7
  Bottom 0.254: v20.32,95.9 JP38.3
OPEN10  (via drill 0.51)
  Top 0.254: v64.77,95.9 U11.7
  Bottom 0.254: v64.77,95.9 JP42.3
OPEN11  (via drill 0.51)
  Top 0.254: v109.22,95.9 U12.7
  Bottom 0.254: v109.22,95.9 JP46.3
PPS  (via drill 0.51)
  Top 0.254: v6.35,20.46 U1.19
  Bottom 0.254: JP2.3 7.62,15.7 6,17.32 6,20.11 v6.35,20.46
PPS1  (via drill 0.51)
  Top 0.254: v50.8,20.46 U2.19
  Bottom 0.254: JP7.3 52.07,15.7 50.45,17.32 50.45,20.11 v50.8,20.46
PPS2  (via drill 0.51)
  Top 0.254: v95.25,20.46 U3.19
  Bottom 0.254: JP11.3 96.52,15.7 94.9,17.32 94.9,20.11 v95.25,20.46
PPS3  (via drill 0.51)
  Top 0.254: v6.35,46.88 U4.19
  Bottom 0.254: JP15.3 7.62,42.11 6,43.73 6,46.53 v6.35,46.88
PPS4  (via drill 0.51)
  Top 0.254: v50.8,46.88 U5.19
  Bottom 0.254: JP19.3 52.07,42.11 50.45,43.73 50.45,46.53 v50.8,46.88
PPS5  (via drill 0.51)
  Top 0.254: v95.25,46.88 U6.19
  Bottom 0.254: JP23.3 96.52,42.11 94.9,43.73 94.9,46.53 v95.25,46.88
PPS6  (via drill 0.51)
  Top 0.254: v6.35,73.3 U7.19
  Bottom 0.254: JP27.3 7.62,68.53 6,70.15 6,72.94 v6.35,73.3
PPS7  (via drill 0.51)
  Top 0.254: v50.8,73.3 U8.19
  Bottom 0.254: JP31.3 52.07,68.53 50.45,70.15 50.45,72.94 v50.8,73.3
PPS8  (via drill 0.51)
  Top 0.254: v95.25,73.3 U9.19
  Bottom 0.254: JP35.3 96.52,68.53 94.9,70.15 94.9,72.94 v95.25,73.3
PPS9  (via drill 0.51)
  Top 0.254: v6.35,99.71 U10.19
  Bottom 0.254: JP39.3 7.62,94.95 6,96.57 6,99.36 v6.35,99.71
PPS10  (via drill 0.51)
  Top 0.254: v50.8,99.71 U11.19
  Bottom 0.254: JP43.3 52.07,94.95 50.45,96.57 50.45,99.36 v50.8,99.71
PPS11  (via drill 0.51)
  Top 0.254: v95.25,99.71 U12.19
  Bottom 0.254: JP47.3 96.52,94.95 94.9,96.57 94.9,99.36 v95.25,99.71
R1  (via drill 0.51)
  Top 0.254: v15.24,19.19 U1.9
  Bottom 0.254: v15.24,19.19 JP1.5
R2  (via drill 0.51)
  Top 0.254: v12.7,20.46 U1.10
  Bottom 0.254: v12.7,20.46 JP1.6
R3  (via drill 0.51)
  Top 0.254: v6.35,23 U1.17
  Bottom 0.254: JP2.1 2.54,21.1 4.45,23 v6.35,23
R4  (via drill 0.51)
  Top 0.254: v6.35,21.73 U1.18
  Bottom 0.254: JP2.2 5.08,20.46 v6.35,21.73
R5  (via drill 0.51)
  Top 0.254: U1.22 v15.24,16.65
  Bottom 0.254: v15.24,16.65 JP2.6
R6  (via drill 0.51)
  Top 0.254: v21.34,11.83 16.26,11.83 15.24,12.84 U1.25
  Bottom 0.254: v21.34,11.83 21.34,7.38 JP2.9
R7
  Top 0.254: U1.26 14.61,11.57 19.05,7.13 24.13,7.13 JP2.10
R8  (via drill 0.51)
  Top 0.254: v59.69,19.19 U2.9
  Bottom 0.254: v59.69,19.19 JP6.5
R9  (via drill 0.51)
  Top 0.254: v57.15,20.46 U2.10
  Bottom 0.254: v57.15,20.46 JP6.6
R10
  Top 0.254: U2.26 59.05,11.57 63.5,7.13 68.58,7.13 JP7.10
R11  (via drill 0.51)
  Top 0.254: v65.79,11.83 60.71,11.83 59.69,12.84 U2.25
  Bottom 0.254: v65.79,11.83 65.79,7.38 JP7.9
R12  (via drill 0.51)
  Top 0.254: U2.22 v59.69,16.65
  Bottom 0.254: v59.69,16.65 JP7.6
R13  (via drill 0.51)
  Top 0.254: v50.8,21.73 U2.18
  Bottom 0.254: JP7.2 49.53,20.46 v50.8,21.73
R14  (via drill 0.51)
  Top 0.254: v50.8,23 U2.17
  Bottom 0.254: JP7.1 46.99,21.1 48.9,23 v50.8,23
R15  (via drill 0.51)
  Top 0.254: v104.14,19.19 U3.9
  Bottom 0.254: v104.14,19.19 JP10.5
R16  (via drill 0.51)
  Top 0.254: v101.6,20.46 U3.10
  Bottom 0.254: v101.6,20.46 JP10.6
R17
  Top 0.254: U3.26 103.5,11.57 107.95,7.13 113.03,7.13 JP11.10
R18  (via drill 0.51)
  Top 0.254: v110.24,11.83 105.16,11.83 104.14,12.84 U3.25
  Bottom 0.254: v110.24,11.83 110.24,7.38 JP11.9
R19  (via drill 0.51)
  Top 0.254: U3.22 v104.14,16.65
  Bottom 0.254: v104.14,16.65 JP11.6
R20  (via drill 0.51)
  Top 0.254: v95.25,21.73 U3.18
  Bottom 0.254: JP11.2 93.98,20.46 v95.25,21.73
R21  (via drill 0.51)
  Top 0.254: v95.25,23 U3.17
  Bottom 0.254: JP11.1 91.44,21.1 93.34,23 v95.25,23
R22  (via drill 0.51)
  Top 0.254: v15.24,45.61 U4.9
  Bottom 0.254: v15.24,45.61 JP14.5
R23  (via drill 0.51)
  Top 0.254: v12.7,46.88 U4.10
  Bottom 0.254: v12.7,46.88 JP14.6
R24
  Top 0.254: U4.26 14.61,37.99 19.05,33.54 24.13,33.54 JP15.10
R25  (via drill 0.51)
  Top 0.254: v21.34,38.24 16.26,38.24 15.24,39.26 U4.25
  Bottom 0.254: v21.34,38.24 21.34,33.8 JP15.9
R26  (via drill 0.51)
  Top 0.254: U4.22 v15.24,43.07
  Bottom 0.254: v15.24,43.07 JP15.6
R27  (via drill 0.51)
  Top 0.254: v6.35,48.15 U4.18
  Bottom 0.254: JP15.2 5.08,46.88 v6.35,48.15
R28  (via drill 0.51)
  Top 0.254: v6.35,49.42 U4.17
  Bottom 0.254: JP15.1 2.54,47.51 4.45,49.42 v6.35,49.42
R29  (via drill 0.51)
  Top 0.254: v59.69,45.61 U5.9
  Bottom 0.254: v59.69,45.61 JP18.5
R30  (via drill 0.51)
  Top 0.254: v57.15,46.88 U5.10
  Bottom 0.254: v57.15,46.88 JP18.6
R31
  Top 0.254: U5.26 59.05,37.99 63.5,33.54 68.58,33.54 JP19.10
R32  (via drill 0.51)
  Top 0.254: v65.79,38.24 60.71,38.24 59.69,39.26 U5.25
  Bottom 0.254: v65.79,38.24 65.79,33.8 JP19.9
R33  (via drill 0.51)
  Top 0.254: U5.22 v59.69,43.07
  Bottom 0.254: v59.69,43.07 JP19.6
R34  (via drill 0.51)
  Top 0.254: v50.8,48.15 U5.18
  Bottom 0.254: JP19.2 49.53,46.88 v50.8,48.15
R35  (via drill 0.51)
  Top 0.254: v50.8,49.42 U5.17
  Bottom 0.254: JP19.1 46.99,47.51 48.9,49.42 v50.8,49.42
R36  (via drill 0.51)
  Top 0.254: v104.14,45.61 U6.9
  Bottom 0.254: v104.14,45.61 JP22.5
R37  (via drill 0.51)
  Top 0.254: v101.6,46.88 U6.10
  Bottom 0.254: v101.6,46.88 JP22.6
R38
  Top 0.254: U6.26 103.5,37.99 107.95,33.54 113.03,33.54 JP23.10
R39  (via drill 0.51)
  Top 0.254: v110.24,38.24 105.16,38.24 104.14,39.26 U6.25
  Bottom 0.254: v110.24,38.24 110.24,33.8 JP23.9
R40  (via drill 0.51)
  Top 0.254: U6.22 v104.14,43.07
  Bottom 0.254: v104.14,43.07 JP23.6
R41  (via drill 0.51)
  Top 0.254: v95.25,48.15 U6.18
  Bottom 0.254: JP23.2 93.98,46.88 v95.25,48.15
R42  (via drill 0.51)
  Top 0.254: v95.25,49.42 U6.17
  Bottom 0.254: JP23.1 91.44,47.51 93.34,49.42 v95.25,49.42
R43  (via drill 0.51)
  Top 0.254: v15.24,72.02 U7.9
  Bottom 0.254: v15.24,72.02 JP26.5
R44  (via drill 0.51)
  Top 0.254: v12.7,73.3 U7.10
  Bottom 0.254: v12.7,73.3 JP26.6
R45
  Top 0.254: U7.26 14.61,64.41 19.05,59.96 24.13,59.96 JP27.10
R46  (via drill 0.51)
  Top 0.254: v21.34,64.66 16.26,64.66 15.24,65.67 U7.25
  Bottom 0.254: v21.34,64.66 21.34,60.21 JP27.9
R47  (via drill 0.51)
  Top 0.254: U7.22 v15.24,69.48
  Bottom 0.254: v15.24,69.48 JP27.6
R48  (via drill 0.51)
  Top 0.254: v6.35,74.56 U7.18
  Bottom 0.254: JP27.2 5.08,73.3 v6.35,74.56
R49  (via drill 0.51)
  Top 0.254: v6.35,75.83 U7.17
  Bottom 0.254: JP27.1 2.54,73.93 4.45,75.83 v6.35,75.83
R50  (via drill 0.51)
  Top 0.254: v59.69,72.02 U8.9
  Bottom 0.254: v59.69,72.02 JP30.5
R51  (via drill 0.51)
  Top 0.254: v57.15,73.3 U8.10
  Bottom 0.254: v57.15,73.3 JP30.6
R52
  Top 0.254: U8.26 59.05,64.41 63.5,59.96 68.58,59.96 JP31.10
R53  (via drill 0.51)
  Top 0.254: v65.79,64.66 60.71,64.66 59.69,65.67 U8.25
  Bottom 0.254: v65.79,64.66 65.79,60.21 JP31.9
R54  (via drill 0.51)
  Top 0.254: U8.22 v59.69,69.48
  Bottom 0.254: v59.69,69.48 JP31.6
R55  (via drill 0.51)
  Top 0.254: v50.8,74.56 U8.18
  Bottom 0.254: JP31.2 49.53,73.3 v50.8,74.56
R56  (via drill 0.51)
  Top 0.254: v50.8,75.83 U8.17
  Bottom 0.254: JP31.1 46.99,73.93 48.9,75.83 v50.8,75.83
R57  (via drill 0.51)
  Top 0.254: v104.14,72.02 U9.9
  Bottom 0.254: v104.14,72.02 JP34.5
R58  (via drill 0.51)
  Top 0.254: v101.6,73.3 U9.10
  Bottom 0.254: v101.6,73.3 JP34.6
R59
  Top 0.254: U9.26 103.5,64.41 107.95,59.96 113.03,59.96 JP35.10
R60  (via drill 0.51)
  Top 0.254: v110.24,64.66 105.16,64.66 104.14,65.67 U9.25
  Bottom 0.254: v110.24,64.66 110.24,60.21 JP35.9
R61  (via drill 0.51)
  Top 0.254: U9.22 v104.14,69.48
  Bottom 0.254: v104.14,69.48 JP35.6
R62  (via drill 0.51)
  Top 0.254: v95.25,74.56 U9.18
  Bottom 0.254: JP35.2 93.98,73.3 v95.25,74.56
R63  (via drill 0.51)
  Top 0.254: v95.25,75.83 U9.17
  Bottom 0.254: JP35.1 91.44,73.93 93.34,75.83 v95.25,75.83
R64  (via drill 0.51)
  Top 0.254: v15.24,98.44 U10.9
  Bottom 0.254: v15.24,98.44 JP38.5
R65  (via drill 0.51)
  Top 0.254: v12.7,99.71 U10.10
  Bottom 0.254: v12.7,99.71 JP38.6
R66
  Top 0.254: U10.26 14.61,90.82 19.05,86.38 24.13,86.38 JP39.10
R67  (via drill 0.51)
  Top 0.254: v21.34,91.08 16.26,91.08 15.24,92.09 U10.25
  Bottom 0.254: v21.34,91.08 21.34,86.63 JP39.9
R68  (via drill 0.51)
  Top 0.254: U10.22 v15.24,95.9
  Bottom 0.254: v15.24,95.9 JP39.6
R69  (via drill 0.51)
  Top 0.254: v6.35,100.98 U10.18
  Bottom 0.254: JP39.2 5.08,99.71 v6.35,100.98
R70  (via drill 0.51)
  Top 0.254: v6.35,102.25 U10.17
  Bottom 0.254: JP39.1 2.54,100.35 4.45,102.25 v6.35,102.25
R71  (via drill 0.51)
  Top 0.254: v59.69,98.44 U11.9
  Bottom 0.254: v59.69,98.44 JP42.5
R72  (via drill 0.51)
  Top 0.254: v57.15,99.71 U11.10
  Bottom 0.254: v57.15,99.71 JP42.6
R73
  Top 0.254: U11.26 59.05,90.82 63.5,86.38 68.58,86.38 JP43.10
R74  (via drill 0.51)
  Top 0.254: v65.79,91.08 60.71,91.08 59.69,92.09 U11.25
  Bottom 0.254: v65.79,91.08 65.79,86.63 JP43.9
R75  (via drill 0.51)
  Top 0.254: U11.22 v59.69,95.9
  Bottom 0.254: v59.69,95.9 JP43.6
R76  (via drill 0.51)
  Top 0.254: v50.8,100.98 U11.18
  Bottom 0.254: JP43.2 49.53,99.71 v50.8,100.98
R77  (via drill 0.51)
  Top 0.254: v50.8,102.25 U11.17
  Bottom 0.254: JP43.1 46.99,100.35 48.9,102.25 v50.8,102.25
R78  (via drill 0.51)
  Top 0.254: v104.14,98.44 U12.9
  Bottom 0.254: v104.14,98.44 JP46.5
R79  (via drill 0.51)
  Top 0.254: v101.6,99.71 U12.10
  Bottom 0.254: v101.6,99.71 JP46.6
R80
  Top 0.254: U12.26 103.5,90.82 107.95,86.38 113.03,86.38 JP47.10
R81  (via drill 0.51)
  Top 0.254: v110.24,91.08 105.16,91.08 104.14,92.09 U12.25
  Bottom 0.254: v110.24,91.08 110.24,86.63 JP47.9
R82  (via drill 0.51)
  Top 0.254: U12.22 v104.14,95.9
  Bottom 0.254: v104.14,95.9 JP47.6
R83  (via drill 0.51)
  Top 0.254: v95.25,100.98 U12.18
  Bottom 0.254: JP47.2 93.98,99.71 v95.25,100.98
R84  (via drill 0.51)
  Top 0.254: v95.25,102.25 U12.17
  Bottom 0.254: JP47.1 91.44,100.35 93.34,102.25 v95.25,102.25
RFIN
  Top 0.508: 25.4,11.45 25.4,11.57 L1.2
  Top 1.27: U1.3 25.4,11.57 JP3.SIG
RFIN1
  Top 0.508: 69.85,11.45 69.85,11.57 L2.2
  Top 1.27: U2.3 69.85,11.57 JP5.SIG
RFIN2
  Top 0.508: 114.3,11.45 114.3,11.57 L3.2
  Top 1.27: U3.3 114.3,11.57 JP9.SIG
RFIN3
  Top 0.508: 25.4,37.86 25.4,37.99 L4.2
  Top 1.27: U4.3 25.4,37.99 JP13.SIG
RFIN4
  Top 0.508: 69.85,37.86 69.85,37.99 L5.2
  Top 1.27: U5.3 69.85,37.99 JP17.SIG
RFIN5
  Top 0.508: 114.3,37.86 114.3,37.99 L6.2
  Top 1.27: U6.3 114.3,37.99 JP21.SIG
RFIN6
  Top 0.508: 25.4,64.28 25.4,64.41 L7.2
  Top 1.27: U7.3 25.4,64.41 JP25.SIG
RFIN7
  Top 0.508: 69.85,64.28 69.85,64.41 L8.2
  Top 1.27: U8.3 69.85,64.41 JP29.SIG
RFIN8
  Top 0.508: 114.3,64.28 114.3,64.41 L9.2
  Top 1.27: U9.3 114.3,64.41 JP33.SIG
RFIN9
  Top 0.508: 25.4,90.69 25.4,90.82 L10.2
  Top 1.27: U10.3 25.4,90.82 JP37.SIG
RFIN10
  Top 0.508: 69.85,90.69 69.85,90.82 L11.2
  Top 1.27: U11.3 69.85,90.82 JP41.SIG
RFIN11
  Top 0.508: 114.3,90.69 114.3,90.82 L12.2
  Top 1.27: U12.3 114.3,90.82 JP45.SIG
RX-A  (via drill 0.51)
  Top 0.254: U1.21 v12.7,17.92
  Bottom 0.254: v12.7,17.92 JP2.5
RX-A1  (via drill 0.51)
  Top 0.254: U2.21 v57.15,17.92
  Bottom 0.254: v57.15,17.92 JP7.5
RX-A2  (via drill 0.51)
  Top 0.254: U3.21 v101.6,17.92
  Bottom 0.254: v101.6,17.92 JP11.5
RX-A3  (via drill 0.51)
  Top 0.254: U4.21 v12.7,44.34
  Bottom 0.254: v12.7,44.34 JP15.5
RX-A4  (via drill 0.51)
  Top 0.254: U5.21 v57.15,44.34
  Bottom 0.254: v57.15,44.34 JP19.5
RX-A5  (via drill 0.51)
  Top 0.254: U6.21 v101.6,44.34
  Bottom 0.254: v101.6,44.34 JP23.5
RX-A6  (via drill 0.51)
  Top 0.254: U7.21 v12.7,70.75
  Bottom 0.254: v12.7,70.75 JP27.5
RX-A7  (via drill 0.51)
  Top 0.254: U8.21 v57.15,70.75
  Bottom 0.254: v57.15,70.75 JP31.5
RX-A8  (via drill 0.51)
  Top 0.254: U9.21 v101.6,70.75
  Bottom 0.254: v101.6,70.75 JP35.5
RX-A9  (via drill 0.51)
  Top 0.254: U10.21 v12.7,97.17
  Bottom 0.254: v12.7,97.17 JP39.5
RX-A10  (via drill 0.51)
  Top 0.254: U11.21 v57.15,97.17
  Bottom 0.254: v57.15,97.17 JP43.5
RX-A11  (via drill 0.51)
  Top 0.254: U12.21 v101.6,97.17
  Bottom 0.254: v101.6,97.17 JP47.5
RX-B  (via drill 0.51)
  Top 0.254: v11.43,19.19 U1.20
  Bottom 0.254: JP2.4 10.16,17.92 v11.43,19.19
RX-B1  (via drill 0.51)
  Top 0.254: v55.88,19.19 U2.20
  Bottom 0.254: JP7.4 54.61,17.92 v55.88,19.19
RX-B2  (via drill 0.51)
  Top 0.254: v100.33,19.19 U3.20
  Bottom 0.254: JP11.4 99.06,17.92 v100.33,19.19
RX-B3  (via drill 0.51)
  Top 0.254: v11.43,45.61 U4.20
  Bottom 0.254: JP15.4 10.16,44.34 v11.43,45.61
RX-B4  (via drill 0.51)
  Top 0.254: v55.88,45.61 U5.20
  Bottom 0.254: JP19.4 54.61,44.34 v55.88,45.61
RX-B5  (via drill 0.51)
  Top 0.254: v100.33,45.61 U6.20
  Bottom 0.254: JP23.4 99.06,44.34 v100.33,45.61
RX-B6  (via drill 0.51)
  Top 0.254: v11.43,72.02 U7.20
  Bottom 0.254: JP27.4 10.16,70.75 v11.43,72.02
RX-B7  (via drill 0.51)
  Top 0.254: v55.88,72.02 U8.20
  Bottom 0.254: JP31.4 54.61,70.75 v55.88,72.02
RX-B8  (via drill 0.51)
  Top 0.254: v100.33,72.02 U9.20
  Bottom 0.254: JP35.4 99.06,70.75 v100.33,72.02
RX-B9  (via drill 0.51)
  Top 0.254: v11.43,98.44 U10.20
  Bottom 0.254: JP39.4 10.16,97.17 v11.43,98.44
RX-B10  (via drill 0.51)
  Top 0.254: v55.88,98.44 U11.20
  Bottom 0.254: JP43.4 54.61,97.17 v55.88,98.44
RX-B11  (via drill 0.51)
  Top 0.254: v100.33,98.44 U12.20
  Bottom 0.254: JP47.4 99.06,97.17 v100.33,98.44
SHORT  (via drill 0.51)
  Top 0.254: v17.78,17.92 U1.8
  Bottom 0.254: v17.78,17.92 JP1.4
SHORT1  (via drill 0.51)
  Top 0.254: v62.23,17.92 U2.8
  Bottom 0.254: v62.23,17.92 JP6.4
SHORT2  (via drill 0.51)
  Top 0.254: v106.68,17.92 U3.8
  Bottom 0.254: v106.68,17.92 JP10.4
SHORT3  (via drill 0.51)
  Top 0.254: v17.78,44.34 U4.8
  Bottom 0.254: v17.78,44.34 JP14.4
SHORT4  (via drill 0.51)
  Top 0.254: v62.23,44.34 U5.8
  Bottom 0.254: v62.23,44.34 JP18.4
SHORT5  (via drill 0.51)
  Top 0.254: v106.68,44.34 U6.8
  Bottom 0.254: v106.68,44.34 JP22.4
SHORT6  (via drill 0.51)
  Top 0.254: v17.78,70.75 U7.8
  Bottom 0.254: v17.78,70.75 JP26.4
SHORT7  (via drill 0.51)
  Top 0.254: v62.23,70.75 U8.8
  Bottom 0.254: v62.23,70.75 JP30.4
SHORT8  (via drill 0.51)
  Top 0.254: v106.68,70.75 U9.8
  Bottom 0.254: v106.68,70.75 JP34.4
SHORT9  (via drill 0.51)
  Top 0.254: v17.78,97.17 U10.8
  Bottom 0.254: v17.78,97.17 JP38.4
SHORT10  (via drill 0.51)
  Top 0.254: v62.23,97.17 U11.8
  Bottom 0.254: v62.23,97.17 JP42.4
SHORT11  (via drill 0.51)
  Top 0.254: v106.68,97.17 U12.8
  Bottom 0.254: v106.68,97.17 JP46.4
TX-A  (via drill 0.51)
  Top 0.254: U1.23 v17.78,15.38
  Bottom 0.254: v17.78,15.38 JP2.7
TX-A1  (via drill 0.51)
  Top 0.254: U2.23 v62.23,15.38
  Bottom 0.254: v62.23,15.38 JP7.7
TX-A2  (via drill 0.51)
  Top 0.254: U3.23 v106.68,15.38
  Bottom 0.254: v106.68,15.38 JP11.7
TX-A3  (via drill 0.51)
  Top 0.254: U4.23 v17.78,41.8
  Bottom 0.254: v17.78,41.8 JP15.7
TX-A4  (via drill 0.51)
  Top 0.254: U5.23 v62.23,41.8
  Bottom 0.254: v62.23,41.8 JP19.7
TX-A5  (via drill 0.51)
  Top 0.254: U6.23 v106.68,41.8
  Bottom 0.254: v106.68,41.8 JP23.7
TX-A6  (via drill 0.51)
  Top 0.254: U7.23 v17.78,68.22
  Bottom 0.254: v17.78,68.22 JP27.7
TX-A7  (via drill 0.51)
  Top 0.254: U8.23 v62.23,68.22
  Bottom 0.254: v62.23,68.22 JP31.7
TX-A8  (via drill 0.51)
  Top 0.254: U9.23 v106.68,68.22
  Bottom 0.254: v106.68,68.22 JP35.7
TX-A9  (via drill 0.51)
  Top 0.254: U10.23 v17.78,94.63
  Bottom 0.254: v17.78,94.63 JP39.7
TX-A10  (via drill 0.51)
  Top 0.254: U11.23 v62.23,94.63
  Bottom 0.254: v62.23,94.63 JP43.7
TX-A11  (via drill 0.51)
  Top 0.254: U12.23 v106.68,94.63
  Bottom 0.254: v106.68,94.63 JP47.7
TX-B  (via drill 0.51)
  Top 0.254: U1.24 v19.05,14.11
  Bottom 0.254: v19.05,14.11 19.05,7.13 JP2.8
TX-B1  (via drill 0.51)
  Top 0.254: U2.24 v63.5,14.11
  Bottom 0.254: v63.5,14.11 63.5,7.13 JP7.8
TX-B2  (via drill 0.51)
  Top 0.254: U3.24 v107.95,14.11
  Bottom 0.254: v107.95,14.11 107.95,7.13 JP11.8
TX-B3  (via drill 0.51)
  Top 0.254: U4.24 v19.05,40.53
  Bottom 0.254: v19.05,40.53 19.05,33.54 JP15.8
TX-B4  (via drill 0.51)
  Top 0.254: U5.24 v63.5,40.53
  Bottom 0.254: v63.5,40.53 63.5,33.54 JP19.8
TX-B5  (via drill 0.51)
  Top 0.254: U6.24 v107.95,40.53
  Bottom 0.254: v107.95,40.53 107.95,33.54 JP23.8
TX-B6  (via drill 0.51)
  Top 0.254: U7.24 v19.05,66.95
  Bottom 0.254: v19.05,66.95 19.05,59.96 JP27.8
TX-B7  (via drill 0.51)
  Top 0.254: U8.24 v63.5,66.95
  Bottom 0.254: v63.5,66.95 63.5,59.96 JP31.8
TX-B8  (via drill 0.51)
  Top 0.254: U9.24 v107.95,66.95
  Bottom 0.254: v107.95,66.95 107.95,59.96 JP35.8
TX-B9  (via drill 0.51)
  Top 0.254: U10.24 v19.05,93.36
  Bottom 0.254: v19.05,93.36 19.05,86.38 JP39.8
TX-B10  (via drill 0.51)
  Top 0.254: U11.24 v63.5,93.36
  Bottom 0.254: v63.5,93.36 63.5,86.38 JP43.8
TX-B11  (via drill 0.51)
  Top 0.254: U12.24 v107.95,93.36
  Bottom 0.254: v107.95,93.36 107.95,86.38 JP47.8
VBAT  (via drill 0.51)
  Top 0.254: U1.6 24,15.38 24.38,15.76 24.38,20.59 v24.89,21.1
  Bottom 0.254: v24.89,21.1 24.89,26.69 JP1.2
VBAT1  (via drill 0.51)
  Top 0.254: U2.6 68.45,15.38 68.83,15.76 68.83,20.59 v69.34,21.1
  Bottom 0.254: v69.34,21.1 69.34,26.69 JP6.2
VBAT2  (via drill 0.51)
  Top 0.254: U3.6 112.9,15.38 113.28,15.76 113.28,20.59 v113.79,21.1
  Bottom 0.254: v113.79,21.1 113.79,26.69 JP10.2
VBAT3  (via drill 0.51)
  Top 0.254: U4.6 24,41.8 24.38,42.18 24.38,47.01 v24.89,47.51
  Bottom 0.254: v24.89,47.51 24.89,53.1 JP14.2
VBAT4  (via drill 0.51)
  Top 0.254: U5.6 68.45,41.8 68.83,42.18 68.83,47.01 v69.34,47.51
  Bottom 0.254: v69.34,47.51 69.34,53.1 JP18.2
VBAT5  (via drill 0.51)
  Top 0.254: U6.6 112.9,41.8 113.28,42.18 113.28,47.01 v113.79,47.51
  Bottom 0.254: v113.79,47.51 113.79,53.1 JP22.2
VBAT6  (via drill 0.51)
  Top 0.254: U7.6 24,68.22 24.38,68.6 24.38,73.42 v24.89,73.93
  Bottom 0.254: v24.89,73.93 24.89,79.52 JP26.2
VBAT7  (via drill 0.51)
  Top 0.254: U8.6 68.45,68.22 68.83,68.6 68.83,73.42 v69.34,73.93
  Bottom 0.254: v69.34,73.93 69.34,79.52 JP30.2
VBAT8  (via drill 0.51)
  Top 0.254: U9.6 112.9,68.22 113.28,68.6 113.28,73.42 v113.79,73.93
  Bottom 0.254: v113.79,73.93 113.79,79.52 JP34.2
VBAT9  (via drill 0.51)
  Top 0.254: U10.6 24,94.63 24.38,95.01 24.38,99.84 v24.89,100.35
  Bottom 0.254: v24.89,100.35 24.89,105.93 JP38.2
VBAT10  (via drill 0.51)
  Top 0.254: U11.6 68.45,94.63 68.83,95.01 68.83,99.84 v69.34,100.35
  Bottom 0.254: v69.34,100.35 69.34,105.93 JP42.2
VBAT11  (via drill 0.51)
  Top 0.254: U12.6 112.9,94.63 113.28,95.01 113.28,99.84 v113.79,100.35
  Bottom 0.254: v113.79,100.35 113.79,105.93 JP46.2
VCC  (via drill 0.51)
  Top 0.254: C3.1 25.67,18.56 25.4,18.29 25.4,18.72 26,19.32 26,22.19 C1.1
  Top 0.406: v9.02,23 U1.12
  Top 0.508: C3.1 25.91,18.56 25.4,18.05 L1.1 | 26.02,22.23 26.04,22.24 26.02,22.26 C1.1 26.04,22.37 25.4,23 U1.12
  Bottom 0.254: SJ1.1 8.7,22.68 v9.02,23 | JP1.8 7.62,25.7 8,25.32 8,24.53 9.02,23.51
  Bottom 0.406: v9.02,23 9.02,23.51
VCC1  (via drill 0.51)
  Top 0.254: C2.1 70.12,18.56 69.85,18.29 69.85,18.72 70.45,19.32 70.45,22.19 C4.1
  Top 0.406: v53.47,23 U2.12
  Top 0.508: C2.1 70.36,18.56 69.85,18.05 L2.1 | 70.47,22.23 70.48,22.24 70.47,22.26 C4.1 70.48,22.37 69.85,23 U2.12
  Bottom 0.254: SJ2.1 53.15,22.68 v53.47,23 | JP6.8 52.07,25.7 52.45,25.32 52.45,24.53 53.47,23.51
  Bottom 0.406: v53.47,23 53.47,23.51
VCC2  (via drill 0.51)
  Top 0.254: C5.1 114.57,18.56 114.3,18.29 114.3,18.72 114.9,19.32 114.9,22.19 C6.1
  Top 0.406: v97.92,23 U3.12
  Top 0.508: C5.1 114.81,18.56 114.3,18.05 L3.1 | 114.92,22.23 114.94,22.24 114.92,22.26 C6.1 114.94,22.37 114.3,23 U3.12
  Bottom 0.254: SJ3.1 97.6,22.68 v97.92,23 | JP10.8 96.52,25.7 96.9,25.32 96.9,24.53 97.92,23.51
  Bottom 0.406: v97.92,23 97.92,23.51
VCC3  (via drill 0.51)
  Top 0.254: C7.1 25.67,44.97 25.4,44.7 25.4,45.13 26,45.73 26,48.6 C8.1
  Top 0.406: v9.02,49.42 U4.12
  Top 0.508: C7.1 25.91,44.97 25.4,44.47 L4.1 | 26.02,48.64 26.04,48.66 26.02,48.67 C8.1 26.04,48.78 25.4,49.42 U4.12
  Bottom 0.254: SJ4.1 8.7,49.1 v9.02,49.42 | JP14.8 7.62,52.11 8,51.73 8,50.94 9.02,49.93
  Bottom 0.406: v9.02,49.42 9.02,49.93
VCC4  (via drill 0.51)
  Top 0.254: C9.1 70.12,44.97 69.85,44.7 69.85,45.13 70.45,45.73 70.45,48.6 C10.1
  Top 0.406: v53.47,49.42 U5.12
  Top 0.508: C9.1 70.36,44.97 69.85,44.47 L5.1 | 70.47,48.64 70.48,48.66 70.47,48.67 C10.1 70.48,48.78 69.85,49.42 U5.12
  Bottom 0.254: SJ5.1 53.15,49.1 v53.47,49.42 | JP18.8 52.07,52.11 52.45,51.73 52.45,50.94 53.47,49.93
  Bottom 0.406: v53.47,49.42 53.47,49.93
VCC5  (via drill 0.51)
  Top 0.254: C11.1 114.57,44.97 114.3,44.7 114.3,45.13 114.9,45.73 114.9,48.6 C12.1
  Top 0.406: v97.92,49.42 U6.12
  Top 0.508: C11.1 114.81,44.97 114.3,44.47 L6.1 | 114.92,48.64 114.94,48.66 114.92,48.67 C12.1 114.94,48.78 114.3,49.42 U6.12
  Bottom 0.254: SJ6.1 97.6,49.1 v97.92,49.42 | JP22.8 96.52,52.11 96.9,51.73 96.9,50.94 97.92,49.93
  Bottom 0.406: v97.92,49.42 97.92,49.93
VCC6  (via drill 0.51)
  Top 0.254: C13.1 25.67,71.39 25.4,71.12 25.4,71.55 26,72.15 26,75.02 C14.1
  Top 0.406: v9.02,75.83 U7.12
  Top 0.508: C13.1 25.91,71.39 25.4,70.88 L7.1 | 26.02,75.06 26.04,75.07 26.02,75.09 C14.1 26.04,75.2 25.4,75.83 U7.12
  Bottom 0.254: SJ7.1 8.7,75.52 v9.02,75.83 | JP26.8 7.62,78.53 8,78.15 8,77.36 9.02,76.34
  Bottom 0.406: v9.02,75.83 9.02,76.34
VCC7  (via drill 0.51)
  Top 0.254: C15.1 70.12,71.39 69.85,71.12 69.85,71.55 70.45,72.15 70.45,75.02 C16.1
  Top 0.406: v53.47,75.83 U8.12
  Top 0.508: C15.1 70.36,71.39 69.85,70.88 L8.1 | 70.47,75.06 70.48,75.07 70.47,75.09 C16.1 70.48,75.2 69.85,75.83 U8.12
  Bottom 0.254: SJ8.1 53.15,75.52 v53.47,75.83 | JP30.8 52.07,78.53 52.45,78.15 52.45,77.36 53.47,76.34
  Bottom 0.406: v53.47,75.83 53.47,76.34
VCC8  (via drill 0.51)
  Top 0.254: C17.1 114.57,71.39 114.3,71.12 114.3,71.55 114.9,72.15 114.9,75.02 C18.1
  Top 0.406: v97.92,75.83 U9.12
  Top 0.508: C17.1 114.81,71.39 114.3,70.88 L9.1 | 114.92,75.06 114.94,75.07 114.92,75.09 C18.1 114.94,75.2 114.3,75.83 U9.12
  Bottom 0.254: SJ9.1 97.6,75.52 v97.92,75.83 | JP34.8 96.52,78.53 96.9,78.15 96.9,77.36 97.92,76.34
  Bottom 0.406: v97.92,75.83 97.92,76.34
VCC9  (via drill 0.51)
  Top 0.254: C19.1 25.67,97.81 25.4,97.54 25.4,97.97 26,98.57 26,101.44 C20.1
  Top 0.406: v9.02,102.25 U10.12
  Top 0.508: C19.1 25.91,97.81 25.4,97.3 L10.1 | 26.02,101.47 26.04,101.49 26.02,101.5 C20.1 26.04,101.62 25.4,102.25 U10.12
  Bottom 0.254: SJ10.1 8.7,101.93 v9.02,102.25 | JP38.8 7.62,104.95 8,104.57 8,103.78 9.02,102.76
  Bottom 0.406: v9.02,102.25 9.02,102.76
VCC10  (via drill 0.51)
  Top 0.254: C21.1 70.12,97.81 69.85,97.54 69.85,97.97 70.45,98.57 70.45,101.44 C22.1
  Top 0.406: v53.47,102.25 U11.12
  Top 0.508: C21.1 70.36,97.81 69.85,97.3 L11.1 | 70.47,101.47 70.48,101.49 70.47,101.5 C22.1 70.48,101.62 69.85,102.25 U11.12
  Bottom 0.254: SJ11.1 53.15,101.93 v53.47,102.25 | JP42.8 52.07,104.95 52.45,104.57 52.45,103.78 53.47,102.76
  Bottom 0.406: v53.47,102.25 53.47,102.76
VCC11  (via drill 0.51)
  Top 0.254: C23.1 114.57,97.81 114.3,97.54 114.3,97.97 114.9,98.57 114.9,101.44 C24.1
  Top 0.406: v97.92,102.25 U12.12
  Top 0.508: C23.1 114.81,97.81 114.3,97.3 L12.1 | 114.92,101.47 114.94,101.49 114.92,101.5 C24.1 114.94,101.62 114.3,102.25 U12.12
  Bottom 0.254: SJ12.1 97.6,101.93 v97.92,102.25 | JP46.8 96.52,104.95 96.9,104.57 96.9,103.78 97.92,102.76
  Bottom 0.406: v97.92,102.25 97.92,102.76
XRST  (via drill 0.51)
  Top 0.254: v10.16,21.73 U1.11
  Bottom 0.254: v10.16,21.73 JP1.7
XRST1  (via drill 0.51)
  Top 0.254: v54.61,21.73 U2.11
  Bottom 0.254: v54.61,21.73 JP6.7
XRST2  (via drill 0.51)
  Top 0.254: v99.06,21.73 U3.11
  Bottom 0.254: v99.06,21.73 JP10.7
XRST3  (via drill 0.51)
  Top 0.254: v10.16,48.15 U4.11
  Bottom 0.254: v10.16,48.15 JP14.7
XRST4  (via drill 0.51)
  Top 0.254: v54.61,48.15 U5.11
  Bottom 0.254: v54.61,48.15 JP18.7
XRST5  (via drill 0.51)
  Top 0.254: v99.06,48.15 U6.11
  Bottom 0.254: v99.06,48.15 JP22.7
XRST6  (via drill 0.51)
  Top 0.254: v10.16,74.56 U7.11
  Bottom 0.254: v10.16,74.56 JP26.7
XRST7  (via drill 0.51)
  Top 0.254: v54.61,74.56 U8.11
  Bottom 0.254: v54.61,74.56 JP30.7
XRST8  (via drill 0.51)
  Top 0.254: v99.06,74.56 U9.11
  Bottom 0.254: v99.06,74.56 JP34.7
XRST9  (via drill 0.51)
  Top 0.254: v10.16,100.98 U10.11
  Bottom 0.254: v10.16,100.98 JP38.7
XRST10  (via drill 0.51)
  Top 0.254: v54.61,100.98 U11.11
  Bottom 0.254: v54.61,100.98 JP42.7
XRST11  (via drill 0.51)
  Top 0.254: v99.06,100.98 U12.11
  Bottom 0.254: v99.06,100.98 JP46.7
XSTBY  (via drill 0.51)
  Top 0.254: JP1.10 2.54,24.91 3.17,24.27 U1.16 4.74,24.32 v7,24.32
  Bottom 0.254: SJ1.2 7.68,23.64 v7,24.32
XSTBY1  (via drill 0.51)
  Top 0.254: JP6.10 46.99,24.91 47.62,24.27 U2.16 49.19,24.32 v51.45,24.32
  Bottom 0.254: SJ2.2 52.13,23.64 v51.45,24.32
XSTBY2  (via drill 0.51)
  Top 0.254: JP10.10 91.44,24.91 92.08,24.27 U3.16 93.64,24.32 v95.9,24.32
  Bottom 0.254: SJ3.2 96.58,23.64 v95.9,24.32
XSTBY3  (via drill 0.51)
  Top 0.254: JP14.10 2.54,51.32 3.17,50.69 U4.16 4.74,50.73 v7,50.73
  Bottom 0.254: SJ4.2 7.68,50.05 v7,50.73
XSTBY4  (via drill 0.51)
  Top 0.254: JP18.10 46.99,51.32 47.62,50.69 U5.16 49.19,50.73 v51.45,50.73
  Bottom 0.254: SJ5.2 52.13,50.05 v51.45,50.73
XSTBY5  (via drill 0.51)
  Top 0.254: JP22.10 91.44,51.32 92.08,50.69 U6.16 93.64,50.73 v95.9,50.73
  Bottom 0.254: SJ6.2 96.58,50.05 v95.9,50.73
XSTBY6  (via drill 0.51)
  Top 0.254: JP26.10 2.54,77.74 3.17,77.11 U7.16 4.74,77.15 v7,77.15
  Bottom 0.254: SJ7.2 7.68,76.47 v7,77.15
XSTBY7  (via drill 0.51)
  Top 0.254: JP30.10 46.99,77.74 47.62,77.11 U8.16 49.19,77.15 v51.45,77.15
  Bottom 0.254: SJ8.2 52.13,76.47 v51.45,77.15
XSTBY8  (via drill 0.51)
  Top 0.254: JP34.10 91.44,77.74 92.08,77.11 U9.16 93.64,77.15 v95.9,77.15
  Bottom 0.254: SJ9.2 96.58,76.47 v95.9,77.15
XSTBY9  (via drill 0.51)
  Top 0.254: JP38.10 2.54,104.16 3.17,103.52 U10.16 4.74,103.57 v7,103.57
  Bottom 0.254: SJ10.2 7.68,102.88 v7,103.57
XSTBY10  (via drill 0.51)
  Top 0.254: JP42.10 46.99,104.16 47.62,103.52 U11.16 49.19,103.57 v51.45,103.57
  Bottom 0.254: SJ11.2 52.13,102.88 v51.45,103.57
XSTBY11  (via drill 0.51)
  Top 0.254: JP46.10 91.44,104.16 92.08,103.52 U12.16 93.64,103.57 v95.9,103.57
  Bottom 0.254: SJ12.2 96.58,102.88 v95.9,103.57

## Text on the board
Bottom: v14 | v14 | v14 | v14 | v14 | v14 | v14 | v14 | v14 | v14 | v14 | v14
bPlace: XSTBY | GND | VCC | XRST | R2 | R1 | SHORT | OPEN | VBAT | LNA | XSTBY | GND | VCC | XRST | R2 | R1 | SHORT | OPEN | VBAT | LNA | XSTBY | GND | VCC | XRST | R2 | R1 | SHORT | OPEN | VBAT | LNA | XSTBY | VCC | XSTBY | VCC | XSTBY | VCC | Copernicus II DIP | Copernicus II DIP | Copernicus II DIP | R3 | R4 | PPS | RX-B | RX-A | R5 | TX-A | TX-B | R6 | R7 | R3 | R4 | PPS | RX-B | RX-A | R5 | TX-A | TX-B | R6 | R7 | R3 | R4 | PPS | RX-B | RX-A | R5 | TX-A | TX-B | R6 | R7 | XSTBY | GND | VCC | XRST | R2 | R1 | SHORT | OPEN | VBAT | LNA | XSTBY | GND | VCC | XRST | R2 | R1 | SHORT | OPEN | VBAT | LNA | XSTBY | GND | VCC | XRST | R2 | R1 | SHORT | OPEN | VBAT | LNA | XSTBY | VCC | XSTBY | VCC | XSTBY | VCC | Copernicus II DIP | Copernicus II DIP | Copernicus II DIP | R3 | R4 | PPS | RX-B | RX-A | R5 | TX-A | TX-B | R6 | R7 | R3 | R4 | PPS | RX-B | RX-A | R5 | TX-A | TX-B | R6 | R7 | R3 | R4 | PPS | RX-B | RX-A | R5 | TX-A | TX-B | R6 | R7 | XSTBY | GND | VCC | XRST | R2 | R1 | SHORT | OPEN | VBAT | LNA | XSTBY | GND | VCC | XRST | R2 | R1 | SHORT | OPEN | VBAT | LNA | XSTBY | GND | VCC | XRST | R2 | R1 | SHORT | OPEN | VBAT | LNA | XSTBY | VCC | XSTBY | VCC | XSTBY | VCC | Copernicus II DIP | Copernicus II DIP | Copernicus II DIP | R3 | R4 | PPS | RX-B | RX-A | R5 | TX-A | TX-B | R6 | R7 | R3 | R4 | PPS | RX-B | RX-A | R5 | TX-A | TX-B | R6 | R7 | R3 | R4 | PPS | RX-B | RX-A | R5 | TX-A | TX-B | R6 | R7 | XSTBY | GND | VCC | XRST | R2 | R1 | SHORT | OPEN | VBAT | LNA | XSTBY | GND | VCC | XRST | R2 | R1 | SHORT | OPEN | VBAT | LNA | XSTBY | GND | VCC | XRST | R2 | R1 | SHORT | OPEN | VBAT | LNA | XSTBY | VCC | XSTBY | VCC | XSTBY | VCC | Copernicus II DIP | Copernicus II DIP | Copernicus II DIP | R3 | R4 | PPS | RX-B | RX-A | R5 | TX-A | TX-B | R6 | R7 | R3 | R4 | PPS | RX-B | RX-A | R5 | TX-A | TX-B | R6 | R7 | R3 | R4 | PPS | RX-B | RX-A | R5 | TX-A | TX-B | R6 | R7